# Altium PCB Pixel1.0_1.PcbDoc
Units mm, origin at the board's own origin, x right, y up, seen from the top; angles counter-clockwise.
Board outline 14 x 15.2 mm, 2 copper layers (Top, Bottom), stack 0.325 mm thick; 24 components, 21 nets, 76 pads, 27 vias.
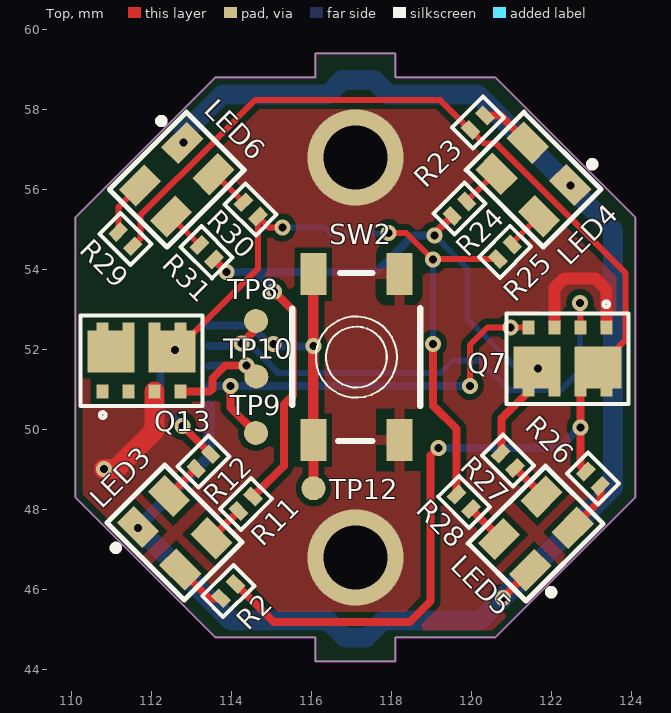
[diagram p0: Top view]
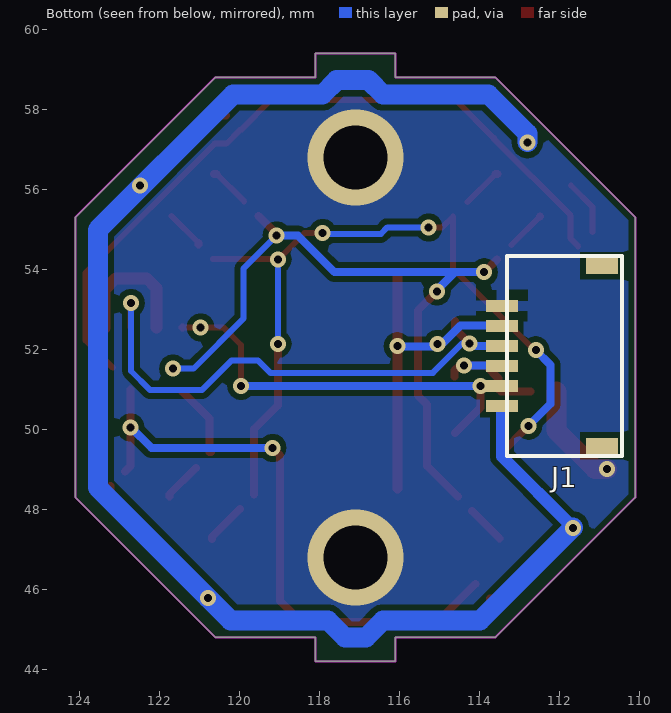
[diagram p1: Bottom view, seen from below]
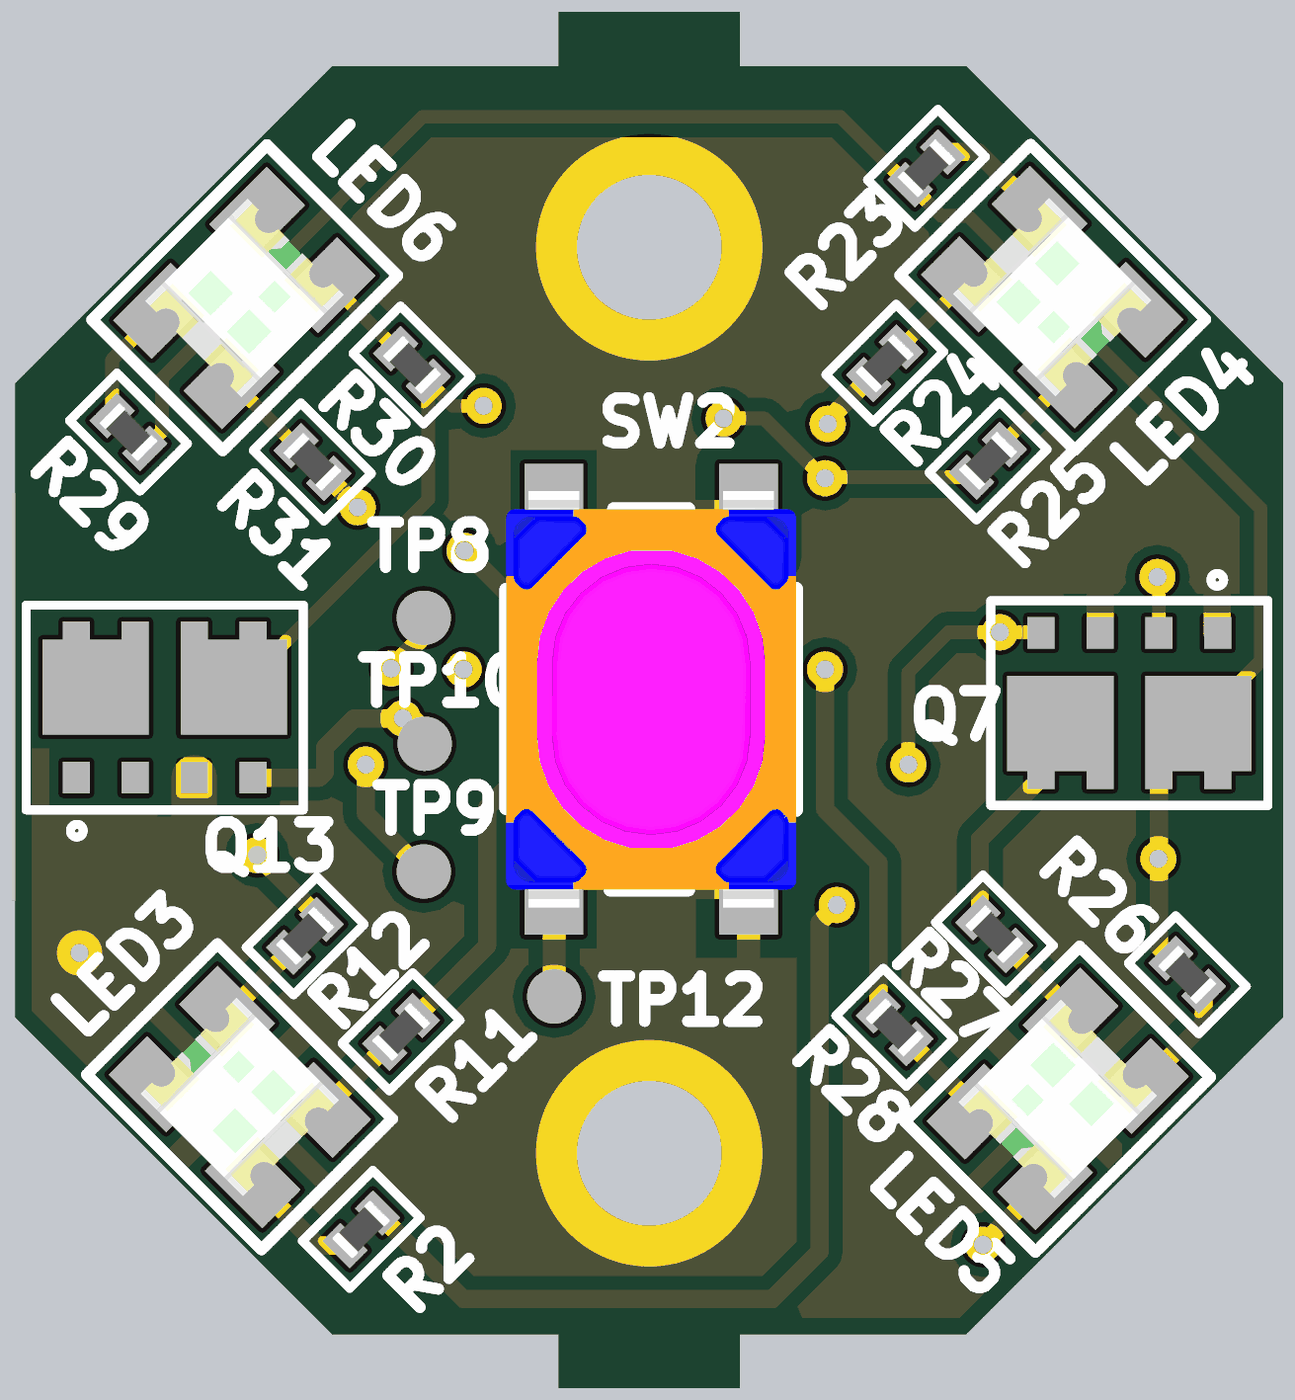
[diagram p2: 3D render of the assembled board from above, using the file's embedded part models]

## Layer stack, top to bottom
Top Solder: solder mask 0.0102, Solder Resist, Dk 3.5
Top: signal copper 0.0356
Dielectric 1: core 0.254, FR-4, Dk 4.2
Bottom: signal copper 0.0356
Bottom Solder: solder mask 0.0102, Solder Resist, Dk 3.5

## Board outline
116.109,44.2 116.109,44.8 113.609,44.8 110.109,48.3 110.109,55.3 113.609,58.8 116.109,58.8 116.109,59.4 118.109,59.4 118.109,58.8 120.609,58.8 124.109,55.3 124.109,48.3 120.609,44.8 118.109,44.8 118.109,44.2

## Design rules (kind name [scope] priority, off if disabled: settings)
Clearance [All] p1: gap=0.15
ComponentClearance [All] p1 off: gap=0.2 collisioncheckmode=3 verticalgap=0.2 showdistances=FALSE
HoleSize [All] p1: absolutevalues=TRUE maxlimit=5 minlimit=0.025 maxpercent=80.000 minpercent=20.000
HoleToHoleClearance mdViaViaSameLayer [All] p1: gap=0.203 allowstackedmicrovias=TRUE
HoleToHoleClearance [All] p2: gap=0.254 allowstackedmicrovias=TRUE
MinimumSolderMaskSliver [All] p1 off: minsoldermaskwidth=0.254
PolygonConnect ThermalVias [IsVia] p1: connectstyle=Direct reliefconductorwidth=0.254 reliefentries=4 polygonreliefangle="90 Angle" airgapwidth=0.254
PolygonConnect [All] p2: connectstyle=Relief reliefconductorwidth=0.254 reliefentries=4 polygonreliefangle="90 Angle" airgapwidth=0.254
RoutingVias [All] p1: holewidth=0.2 width=0.4 viastyle="Through Hole" minholewidth=0.2 minwidth=0.4 maxholewidth=3 maxwidth=5
ShortCircuit [All] p1 off: allowed=FALSE
SilkToBoardRegionClearance [All] p1 off:
SilkToSilkClearance [All] p1 off: silktosilkclearance=0.254
SilkToSolderMaskClearance [IsPad] p1 off: minsilkscreentomaskgap=0.254 clearancetoexposedcopper=TRUE
SolderMaskExpansion via [isvia] p1: expansion=0 soldermaskfromhole=TRUE
SolderMaskExpansion [All] p2: expansion=0.05
Width [All] p1: maxlimit=3 minlimit=0.1 preferedwidth=0.15
22 further rules are at their usual default settings.

## Components (designator, comment, footprint, x,y, rotation, side; value= is the part's Value field where it differs from the comment)
J1 "FH34SRJ-6S-0.5SH(50)" 59453061110ECHLF 113.45,51.84 r90 bottom locked
LED3 "HSMF-C114" HSMFC114 112.59,47.42 r45 top
LED4 "HSMF-C114" HSMFC114 121.56,56.25 r225 top
LED5 "HSMF-C114" HSMFC114 121.62,47.4 r135 top
LED6 "HSMF-C114" HSMFC114 112.64,56.24 r315 top
Q7 "SI5936" 1206-8CHIP-FET 122.41,51.769 r180 top
Q13 "SI5936" 1206-8CHIP-FET 111.76,51.72 r0 top
R2 "51" R0201 113.93,45.96 r225 top
R11 "51" R0201 114.37,48.14 r225 top
R12 "300" R0201 113.31,49.2 r225 top
R23 "51" R0201 120.17,57.671 r45 top
R24 "51" R0201 119.71,55.52 r45 top
R25 "300" R0201 120.85,54.442 r45 top
R26 "51" R0201 123.05,48.77 r315 top
R27 "51" R0201 120.92,49.22 r315 top
R28 "300" R0201 119.82,48.19 r315 top
R29 "51" R0201 111.36,54.76 r135 top
R30 "51" R0201 113.39,54.43 r135 top
R31 "300" R0201 114.49,55.5 r135 top
SW2 "RACON12" RACON12 117.13,51.81 r270 top locked
TP8 "TPTP06R" TP06R 114.62,52.71 r225 top
TP9 "TPTP06R" TP06R 114.62,49.91 r225 top
TP10 "TPTP06R" TP06R 114.63,51.32 r225 top
TP12 "TPTP06R" TP06R 116.06,48.53 r90 top

## Footprints (in the part's own frame and the unit in brackets; to place one, negate y for a bottom-side part, rotate by r counter-clockwise, add the part's x,y. Pads: shape width x height; smd on the part's side, far side on the other; paste and mask are expansions set on the pad)
1206-8CHIP-FET [mm] "1206-8CHIP-FET"
  rect 0.3x0.35 smd: 1(-0.975,-0.775) 2(-0.325,-0.775) 3(0.325,-0.775) 4(0.975,-0.775) 56(0.325,0.775) 56(0.975,0.775) 78(-0.975,0.775) 78(-0.325,0.775)
  rect 1.175x1.05 smd: 56(0.763,0.225) 78(-0.763,0.225)
  silkscreen extent -1.53,-1.43 1.53,1.13, body extent -1.39,-0.82 1.39,0.83, height 0.85
59453061110ECHLF [mm] "FPC/FFC SFVL Series, 6 Pos, Bottom Side Contact, Side Entry Surface Mount ZIF Connector, 0.5 mm (0.02 in.), Lead Free type, Short tail type"
  rect 0.3x0.8 smd: 1(-1.25,0) 2(-0.75,0) 3(-0.25,0) 4(0.25,0) 5(0.75,0) 6(1.25,0)
  rect 0.4x0.8 smd: 7(-2.25,-2.5) 8(2.25,-2.5)
  silkscreen extent -2.5,-3 2.5,-0.13, body extent -2.25,-3.37 2.25,0.23, height 0.9
HSMFC114 [mm] "HSMFC114"
  rect 0.6x0.9 smd: 1(-0.55,0.75) 2(0.55,0.75) 3(0.55,-0.75) 4(-0.55,-0.75)
  silkscreen extent -1.34,-1.36 1.02,1.37, body extent -0.75,-0.8 0.75,0.8, height 0.34
R0201 [mm] "R0201"
  rect 0.28x0.43 smd: 1(-0.255,0) 2(0.255,0)
  silkscreen extent -0.55,-0.37 0.55,0.37, body extent -0.32,-0.16 0.33,0.16, height 0.24
RACON12 [mm] "RACON12"
  rrect3% 1.05x0.65 smd: P$1(-2.075,1.075)
  rect 1.05x0.65 smd: P$2(2.075,1.075) P$3(-2.075,-1.075) P$4(2.075,-1.075)
  silkscreen extent -2.1,-1.6 2.1,1.6, body extent -2.3,-1.6 2.3,1.6, height 2.5
TP06R [mm]
  round 0.6 smd: TP(0,0)

## Part data
J1: library part "WE-ZIF Connector WR-FPC 68710614522", "WR-FPC 0.50mm SMT ZIF Horizontal Bottom Contact"
LED3 LED4 LED5 LED6: "Chip LED RGB   Source: http://document.sharpsma.com/files/GM1WA55311A_SS.pdf"
R2 R11 R12 R23 R24 R25 R26 R27 R28 R29 R30 R31: library part R-US_R0201, "RESISTOR, American symbol"
SW2: "ITT SWITCH"
TP8 TP9 TP10 TP12: "Test pad"

## Via types
v1: diameter 0.4, hole 0.2, Top to Bottom, 25 vias
v2: diameter 2.4/2.4 (per signal layer), hole 1.6, Top to Bottom, 2 vias

## Nets (pads, with @x,y where several pads share a name; then routed paths per layer and width w, separated by ;. In a path a pad name is that pad's centre, name@x,y a point inside that pad or via, vN(x,y) a via of type N, cw(c..) or ccw(c..) an arc to the next point about the centre after c; other vN are vias at no path point)
B_CH2/MOSI: J1.4 Q7.2 TP8.TP | length 13.3
  Top w0.15: v1(122.72,53.16) 122.735,53.145 Q7.2
  Top w0.2: v1(114.26,52.15) 114.62,52.51 TP8.TP
  Bottom w0.15: v1(114.26,52.15) 114.441,52.15 115.176,51.415 119.235,51.415 119.54,51.72 120.21,51.72 120.94,50.99 122.25,50.99 122.72,51.46 v1@122.72,53.18
  Bottom w0.2: J1.4 114.2,52.09 v1(114.26,52.15)
BAT+: J1.1 LED3.1 LED4.1 LED5.1 LED6.1 | length 38.8
  Top w0.2: v1@120.81,45.79 120.81,45.812 LED5.1 LED5.1@121.481,46.483
  Bottom w0.3: v1@111.671,47.55 113.45,49.329 J1.1
  Bottom w0.5: v1@111.671,47.55 113.995,45.225 116.421,45.225 116.846,44.8 117.372,44.8 117.797,45.225 120.228,45.225 v1(120.793,45.79) 123.55,48.547 123.55,54.99 120.165,58.375 117.933,58.375 117.577,58.73 116.776,58.73 116.421,58.375 113.785,58.375 112.81,57.4 v1@112.81,57.18
  other v1: 111.671,47.54 122.49,56.1 112.81,57.17
G_CH2/SS: J1.2 Q7.4 TP9.TP | length 10.6
  Top w0.15: v1(119.97,51.09) 119.97,52.11 120.41,52.55 v1(120.98,52.55) Q7.4@121.429,52.55
  Top w0.2: v1(113.98,51.09) 113.98,50.55 TP9.TP ; Q7.4@121.429,52.55 Q7.4
  Bottom w0.2: J1.2 v1(113.98,51.09) v1(119.97,51.09)
GND: J1.6 Q7.1 Q7.3 Q13.3 SW2.P$1 SW2.P$2 | length 6.1
  Top w0.3: Q7.3 122.085,53.535 122.329,53.779 123.101,53.779 123.38,53.5 Q7.1@123.38,52.54
  Top w0.5: v1(110.82,49.01) 111.12,49.01 112.085,49.975 Q13.3
  other v2: 117.109,46.8 117.109,56.8
NetLED3_2: LED3.2 R12.2 | length 1
  Top w0.2: LED3.2 R12.2
NetLED3_3: LED3.3 R11.2 | length 1
  Top w0.2: LED3.3 R11.2
NetLED3_4: LED3.4 R2.2 | length 1.3
  Top w0.2: LED3.4 113.453,45.78 R2.2
NetLED4_2: LED4.2 R25.2 | length 1
  Top w0.15: R25.2@121.03,54.66 LED4.2
  Top w0.2: R25.2 R25.2@121.03,54.66
NetLED4_3: LED4.3 R24.2 | length 1
  Top w0.15: R24.2 LED4.3@120.581,56.391
  Top w0.2: LED4.3@120.581,56.391 LED4.3
NetLED4_4: LED4.4 R23.2 | length 1.4
  Top w0.2: R23.2 120.737,57.851 LED4.4
NetLED5_2: LED5.2 R28.2 | length 1
  Top w0.2: R28.2 120.701,47.309 LED5.2
NetLED5_3: LED5.3 R27.2 | length 1
  Top w0.2: R27.2 121.761,48.379 LED5.3
NetLED5_4: LED5.4 R26.2 | length 1.3
  Top w0.2: LED5.4 123.23,48.233 R26.2
NetLED6_2: LED6.2 R31.2 | length 1
  Top w0.15: LED6.2@113.609,56.381 R31.2
  Top w0.2: LED6.2 LED6.2@113.609,56.381
NetLED6_3: LED6.3 R30.2 | length 1
  Top w0.15: LED6.3 R30.2
NetLED6_4: LED6.4 R29.2 | length 1.4
  Top w0.15: R29.2 111.18,55.557 LED6.4
P2_1/DD/BLESW: J1.5 SW2.P$3 SW2.P$4 TP12.TP | length 8.3
  Top w0.2: SW2.P$4 SW2.P$4@116.06,49.73
  Top w0.254: SW2.P$4 SW2.P$3 ; TP12.TP SW2.P$4@116.06,49.73
  Bottom w0.2: J1.5 113.45,52.6 114.48,52.6 v1@115.01,52.07 ; v1(115.06,52.14) 115.06,52.12 v1@115.01,52.07 ; v1@116.05,52.07 v1@115.01,52.07
  other v1: 116.06,52.08
R_CH2/C: J1.3 Q13.4 TP10.TP | length 3.5
  Top w0.2: Q13.4 113.465,50.945 113.53,51.01 113.53,51.276 113.854,51.6 v1(114.39,51.6) 114.48,51.6 114.5,51.58 114.51,51.59 114.63,51.47 TP10.TP
  Bottom w0.2: J1.3 113.46,51.58 113.48,51.6 v1(114.39,51.6)
RQBLUE: Q7.78 R2.1 R23.1 R26.1 R29.1 | length 33.9
  Top w0.15: R29.1 111.73,54.769 111.73,55.35 113.65,57.27 113.65,57.283 114.607,58.24 119.22,58.24 R23.1@119.98,57.48 ; R23.1 120.333,57.147 120.628,57.147 123.858,53.916 123.858,52.23 Q7.78@123.173,51.544
  Top w0.2: R2.1 115.061,45.19 118.47,45.19 118.99,45.71 118.99,49.35 v1(119.18,49.54) ; Q7.78@122.735,50.994 122.735,49.085 R26.1
  Bottom w0.2: v1@119.19,49.54 122.21,49.54 v1@122.73,50.06
  other v1: 122.73,50.05
RQGREEN: Q7.56 R11.1 R24.1 R27.1 R30.1 | length 19.7
  Top w0.2: R30.1 v1(113.89,53.93) ; R11.1 115.32,49.09 115.32,50.62 115.55,50.85 115.55,52.97 v1@115.06,53.46 ; v1(119.08,54.85) 119.08,54.89 R24.1 ; R27.1@120.72,49.43 120.76,49.43 120.76,50.27 Q7.56@121.44,50.95
  Bottom w0.15: v1(119.08,54.85) 119.91,54.02 119.91,52.77 121.159,51.521 v1(121.67,51.521)
  Bottom w0.2: v1@113.89,53.937 114.622,53.937 ; v1(115.07,53.45) 115.07,53.49 114.622,53.937 ; v1(119.08,54.85) 118.55,54.85 117.637,53.937 114.622,53.937
RQRED: Q13.56 R12.1 R25.1 R28.1 R31.1 | length 20.5
  Top w0.15: Q13.56@112.59,52.02 112.67,52.02 114.67,54.02 R31.1 114.94,55.05 v1(115.28,55.05) ; v1(117.93,54.91) 118.378,54.91 119.026,54.261 R25.1
  Top w0.2: Q13.56@112.557,51.98 112.557,51.987 Q13.56@112.59,52.02 ; v1(112.78,50.091) R12.1 ; 119.05,51.77 v1(119.05,52.14) 119.05,50.6 119.64,50.01 R28.1
  Bottom w0.15: v1(115.28,55.05) 116.31,55.05 116.473,54.887 117.907,54.887 v1(117.93,54.91) ; v1(119.05,52.14) v1(119.05,54.25)
  Bottom w0.2: v1(112.6,51.98) 112.23,51.61 112.23,50.641 v1(112.78,50.091)
pads on no net: J1.7 J1.8 Q13.1 Q13.2 Q13.78

## Polygon pours and split planes (outlines as drawn)
GND on Top "Top-No Net" (solid, remove dead copper, pour order 4): 109.59,60.06 124.24,60.06 124.27,60.03 124.27,43.92 109.95,43.92 109.92,43.89 109.62,44.19 109.62,60.06
GND on Bottom "Bottom-No Net" (solid, remove dead copper, pour order 8): 109.89,59.93 124.54,59.93 124.54,43.78 109.93,43.78 109.84,43.87 109.84,59.88

## Keep-outs
Keep-Out Layer:
  the board outline again, w0.051